# Allegro board SoilSensor.brd
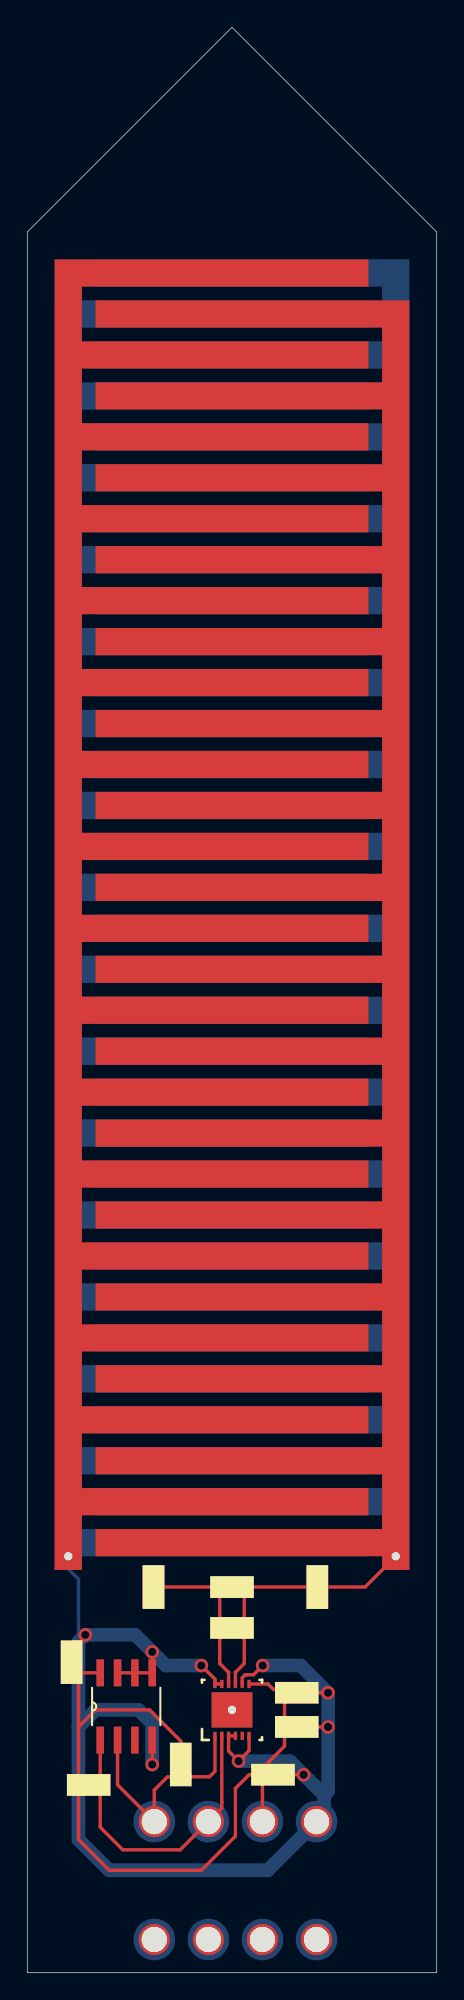
[diagram p0: board, top side]
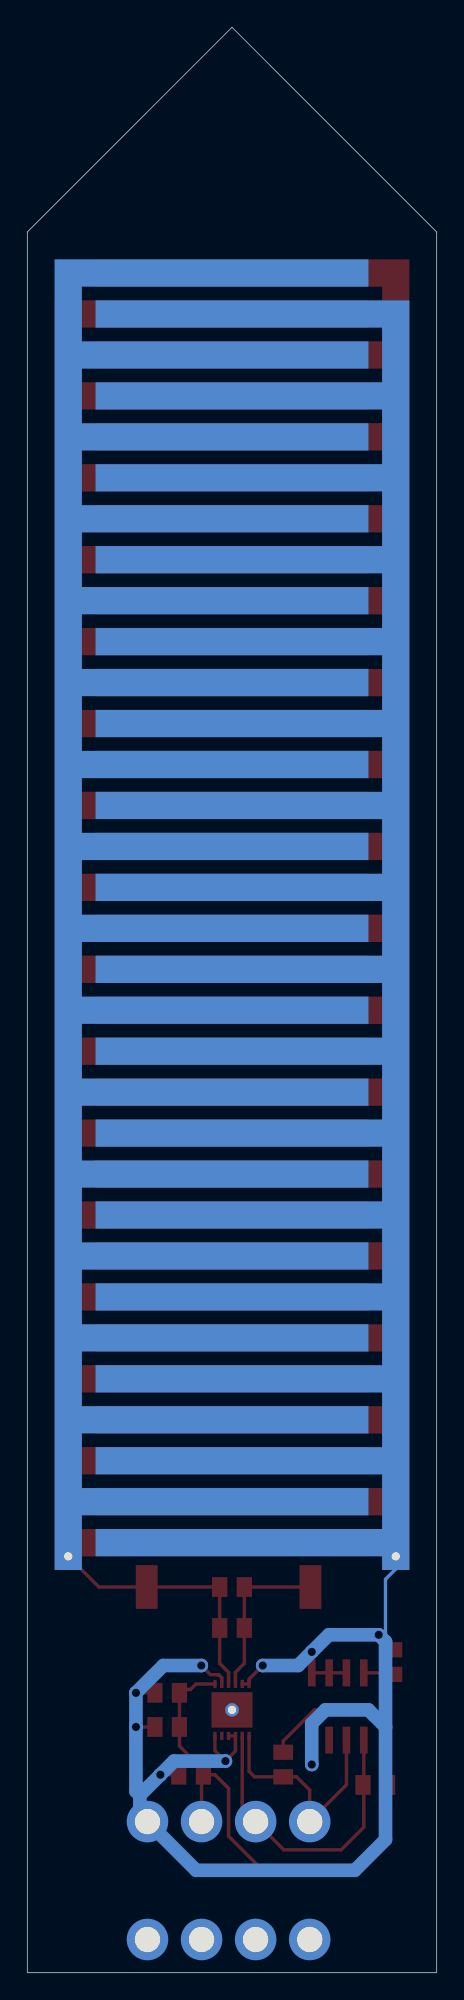
[diagram p1: board, bottom side, seen from below]

Outline 30 x 142.5 mm; copper layers: TOP, BOTTOM. Coordinates in mm from the lower left corner of the outline.
Outline path: 0,127.5 15,142.5 30,127.5 30,0 0,0 0,127.5

## Design rules (mm)
constraint set DEFAULT: min track width 0.25, pair gap 0.15

## Placement (name value [footprint] x y rotation side)
C1  60n  [SENSOR]  15 29.5 180 bottom
C2  3.3p  [CAP_0805]  15 25.25 180 top
C3  1u  [CAP_0805]  19.75 18 0 top
C4  0.1u  [CAP_0805]  19.75 20.5 0 top
C5  0.1u  [CAP_0805]  3.25 22.75 90 top
C6  1u  [CAP_0805]  18 14.5 180 top
J1  CON4  [CONN4]  15.25 6.75 0 top
L1  18uH  [IND_0805]  15 28.25 0 top
R1  1k  [RES_0805]  11.25 15.25 270 top
R2  1k  [RES_0805]  4.5 13.75 0 top
TP1  TEST POINT  [TESTPOINT]  9.25 28.25 0 top
TP2  TEST POINT  [TESTPOINT]  21.25 28.25 0 top
U1  FCD2112  [DNT0012B]  15 19.25 90 top
U2  TMP275  [D8]  7.25 19.5 90 top

## Library data of the parts
C1 = C_var
C2-C6 = C
J1 = CON4
L1 = L
R1 R2 = R
TP1 TP2 = TEST POINT
U1 = FDC2112
U2 = TMP275

## Footprints (pads in the part's own frame, mm; a bottom-side part is the same pattern mirrored in y, then rotated)
CAP_0805
  rect 1.118x1.448 smd: 1(-0.902,0) 2(0.902,0)
CONN4
  round 2.286 hole 1.854: (-5.944,-4.318) (-1.981,-4.318) (1.981,-4.318) (5.944,-4.318) 1(-5.944,4.318) 2(-1.981,4.318) 3(1.981,4.318) 4(5.944,4.318)
D8
  rect 1.981x0.559 smd: 1(-2.464,1.905) 2(-2.464,0.635) 3(-2.464,-0.635) 4(-2.464,-1.905) 5(2.464,-1.905) 6(2.464,-0.635) 7(2.464,0.635) 8(2.464,1.905)
DNT0012B
  round 1 hole 0.6: (0,0)
  rect 2.6x3 smd: (0,0)
  rect 0.6x0.25 smd: 1(-1.9,1.25) 2(-1.9,0.75) 3(-1.9,0.25) 4(-1.9,-0.25) 5(-1.9,-0.75) 6(-1.9,-1.25) 7(1.9,-1.25) 8(1.9,-0.75) 9(1.9,-0.25) 10(1.9,0.25) 11(1.9,0.75) 12(1.9,1.25)
IND_0805
  rect 1.118x1.448 smd: 1(-0.902,0) 2(0.902,0)
RES_0805
  rect 1.118x1.448 smd: 1(-0.902,0) 2(0.902,0)
SENSOR
  round 1 hole 0.6: 1(-12,1) 2(12,1)
TESTPOINT
  rect 1.6x3.2 smd: 1(0,0)

## Nets
VCC: C3.1 C4.1 C5.1 C6.2 J1.3 R1.1 R2.1 U1.7(VDD) U2.8(V+)
0: C1.2 C3.2 C4.2 C5.2 C6.1 J1.4 U1.3 U1.4 U1.6 U1.8 U1.11 U1.12 U2.4 U2.5 U2.6 U2.7
SCL: J1.1 R1.2 U1.1 U2.2
SDA: J1.2 R2.2 U1.2 U2.1
VC_IN: C1.1 C2.1 L1.2 TP2.1 U1.9
N00369: C2.2 L1.1 TP1.1 U1.10

Pads without a net: U1 5; U2 3

## Via types
v1: diameter 1, hole 0.6, TOP to BOTTOM, 9 vias

## Routing (per net, layer and track width the routed paths; a pad name or vN(x,y) marks a point on that pad's centre or on a via; arc(x,y) is an arc through that point)
VCC: length 56.6
  TOP w0.25: R2.1 3.75,13.75 ; 3.75,13.75 3.75,18 ; 3.75,13.75 3.75,9.75 6,7.5 12.75,7.5 15.25,10 15.25,13.5 16.25,14.5 C6.2 ; 3.75,18 3.75,21.85 ; 3.75,18 5,19.25 8.96,19.25 11.25,16.96 R1.1 ; 3.75,21.85 C5.1 ; 3.75,21.85 3.85,21.85 3.96,21.96 U2.8 ; C6.2 17.23,14.37 J1.3 ; C6.2 17.1,14.85 18.85,16.6 C3.1 C4.1 18.85,20.75 18.04,20.75 17.64,21.15 U1.7
0: length 104.1
  TOP w0.25: v1(9.16,23.5) U2.5 U2.6 U2.7 ; v1(4.25,24.75) 4.25,24.49 3.42,23.65 C5.2 ; U2.4 v1(9.16,15.25) ; U1.4 U1.3 14.75,16.23 v1(15.48,15.5) 16.25,16.27 U1.6 ; v1(22.04,18) C3.2 ; C6.1 v1(20.25,14.5) ; U1.11 U1.12 13.75,21.5 v1(12.75,22.5) ; v1(17.25,22.5) 16.58,21.83 16.08,21.83 16.07,21.83 15.97,21.83 15.75,21.61 U1.8 ; v1(22.04,20.5) C4.2
  BOTTOM w0.25: 3.75,24.25 3.75,28.82 3,29.57 C1.2
  BOTTOM w1: 3.75,18 3.75,9.75 6,7.5 17.63,7.5 J1.4 21.75,11.62 21.75,13 ; 3.75,18 3.75,24.25 v1(4.25,24.75) 7.91,24.75 v1(9.16,23.5) 10.16,22.5 v1(12.75,22.5) ; 3.75,18 5,19.25 8.16,19.25 9.16,18.25 v1(9.16,15.25) ; 21.75,13 v1(20.25,14.5) 19.25,15.5 v1(15.48,15.5) ; 21.75,13 22.04,13.29 v1(22.04,18) v1(22.04,20.5) 20.04,22.5 v1(17.25,22.5)
SCL: length 17
  TOP w0.25: U1.1 13.75,14.75 13.35,14.35 R1.2 10.27,14.35 9.31,13.38 J1.1 6.62,13.76 U2.2
SDA: length 22.6
  TOP w0.25: 5.35,13.75 5.35,10.66 7,9 11.2,9 J1.2 14.26,12.05 14.26,12.49 14.25,12.5 U1.2 ; 5.35,13.75 U2.1 ; 5.35,13.75 R2.2
VC_IN: length 19.4
  TOP w0.25: C1.1 24.75,28.25 TP2.1 L1.2 C2.1 15.9,22.65 15.25,22 U1.9
N00369: length 12.2
  TOP w0.25: U1.10 14.75,22 14.1,22.65 C2.2 L1.1 TP1.1

## Copper pours and planes (outline as drawn; the poured copper is in the pictures)
0 on TOP (solid shape): 25,123.5 4,123.5 4,119.5 25,119.5 25,117.5 4,117.5 4,113.5 25,113.5 25,111.5 4,111.5 4,107.5 25,107.5 25,105.5 4,105.5 4,101.5 25,101.5 25,99.5 4,99.5 4,95.5 25,95.5 25,93.5 4,93.5 4,89.5 25,89.5 25,87.5 4,87.5 4,83.5 25,83.5 25,81.5 4,81.5 4,77.5 25,77.5 25,75.5 4,75.5 4,71.5 25,71.5 25,69.5 4,69.5 4,65.5 25,65.5 25,63.5 4,63.5 4,59.5 25,59.5 25,57.5 4,57.5 4,53.5 25,53.5 25,51.5 4,51.5 4,47.5 25,47.5 25,45.5 4,45.5 4,41.5 25,41.5 25,39.5 4,39.5 4,35.5 25,35.5 25,33.5 4,33.5 4,29.5 2,29.5 2,125.5 25,125.5
0 on BOTTOM (solid shape): 25,120.5 4,120.5 4,116.5 25,116.5 25,114.5 4,114.5 4,110.5 25,110.5 25,108.5 4,108.5 4,104.5 25,104.5 25,102.5 4,102.5 4,98.5 25,98.5 25,96.5 4,96.5 4,92.5 25,92.5 25,90.5 4,90.5 4,86.5 25,86.5 25,84.5 4,84.5 4,80.5 25,80.5 25,78.5 4,78.5 4,74.5 25,74.5 25,72.5 4,72.5 4,68.5 25,68.5 25,66.5 4,66.5 4,62.5 25,62.5 25,60.5 4,60.5 4,56.5 25,56.5 25,54.5 4,54.5 4,50.5 25,50.5 25,48.5 4,48.5 4,44.5 25,44.5 25,42.5 4,42.5 4,38.5 25,38.5 25,36.5 4,36.5 4,32.5 25,32.5 25,30.5 4,30.5 4,29.5 2,29.5 2,122.5 25,122.5
VC_IN on TOP (solid shape): 28,29.5 26,29.5 26,30.5 5,30.5 5,32.5 26,32.5 26,36.5 5,36.5 5,38.5 26,38.5 26,42.5 5,42.5 5,44.5 26,44.5 26,48.5 5,48.5 5,50.5 26,50.5 26,54.5 5,54.5 5,56.5 26,56.5 26,60.5 5,60.5 5,62.5 26,62.5 26,66.5 5,66.5 5,68.5 26,68.5 26,72.5 5,72.5 5,74.5 26,74.5 26,78.5 5,78.5 5,80.5 26,80.5 26,84.5 5,84.5 5,86.5 26,86.5 26,90.5 5,90.5 5,92.5 26,92.5 26,96.5 5,96.5 5,98.5 26,98.5 26,102.5 5,102.5 5,104.5 26,104.5 26,108.5 5,108.5 5,110.5 26,110.5 26,114.5 5,114.5 5,116.5 26,116.5 26,120.5 5,120.5 5,122.5 28,122.5
VC_IN on BOTTOM (solid shape): 28,29.5 26,29.5 26,33.5 5,33.5 5,35.5 26,35.5 26,39.5 5,39.5 5,41.5 26,41.5 26,45.5 5,45.5 5,47.5 26,47.5 26,51.5 5,51.5 5,53.5 26,53.5 26,57.5 5,57.5 5,59.5 26,59.5 26,63.5 5,63.5 5,65.5 26,65.5 26,69.5 5,69.5 5,71.5 26,71.5 26,75.5 5,75.5 5,77.5 26,77.5 26,81.5 5,81.5 5,83.5 26,83.5 26,87.5 5,87.5 5,89.5 26,89.5 26,93.5 5,93.5 5,95.5 26,95.5 26,99.5 5,99.5 5,101.5 26,101.5 26,105.5 5,105.5 5,107.5 26,107.5 26,111.5 5,111.5 5,113.5 26,113.5 26,117.5 5,117.5 5,119.5 26,119.5 26,123.5 5,123.5 5,125.5 28,125.5

## Text on the board
NCLEGEND-1-2: FIGURE | FINISHED_SIZE | 0.6 | 1.8542 | DRILL CHART: TOP to BOTTOM | ALL UNITS ARE IN MILLIMETERS | PLATED | QTY | 12 | 8
